# Altium PCB pcb_ordered.PcbDoc
Units mm, origin at the board's own origin, x right, y up, seen from the top; angles counter-clockwise.
Board outline 50.5 x 50 mm, 2 copper layers (Top Layer, Bottom Layer); 100 components, 66 nets, 343 pads, 290 vias.
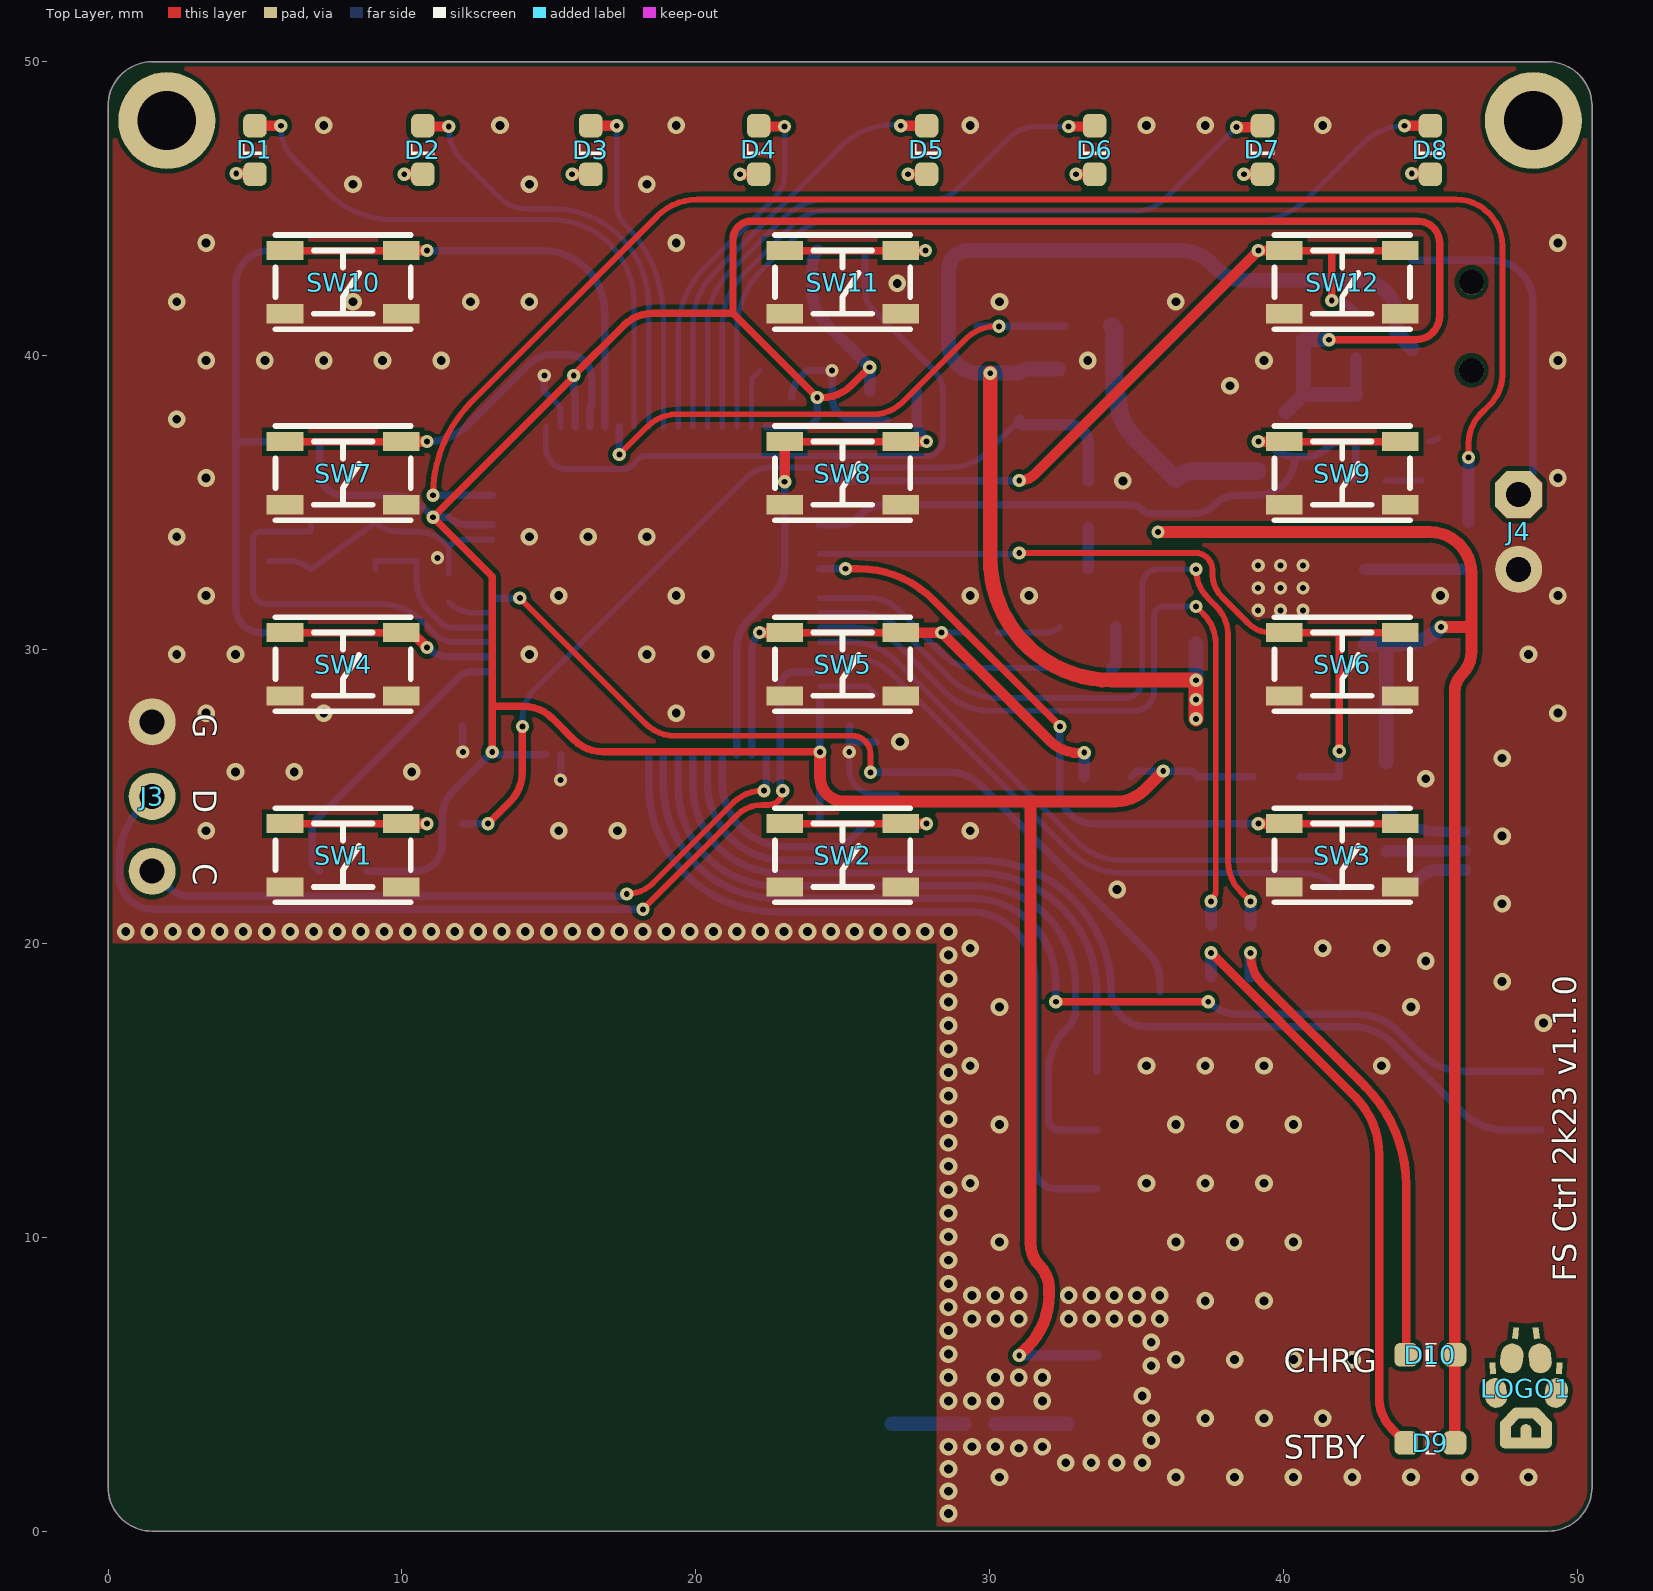
[diagram p0: Top Layer view]
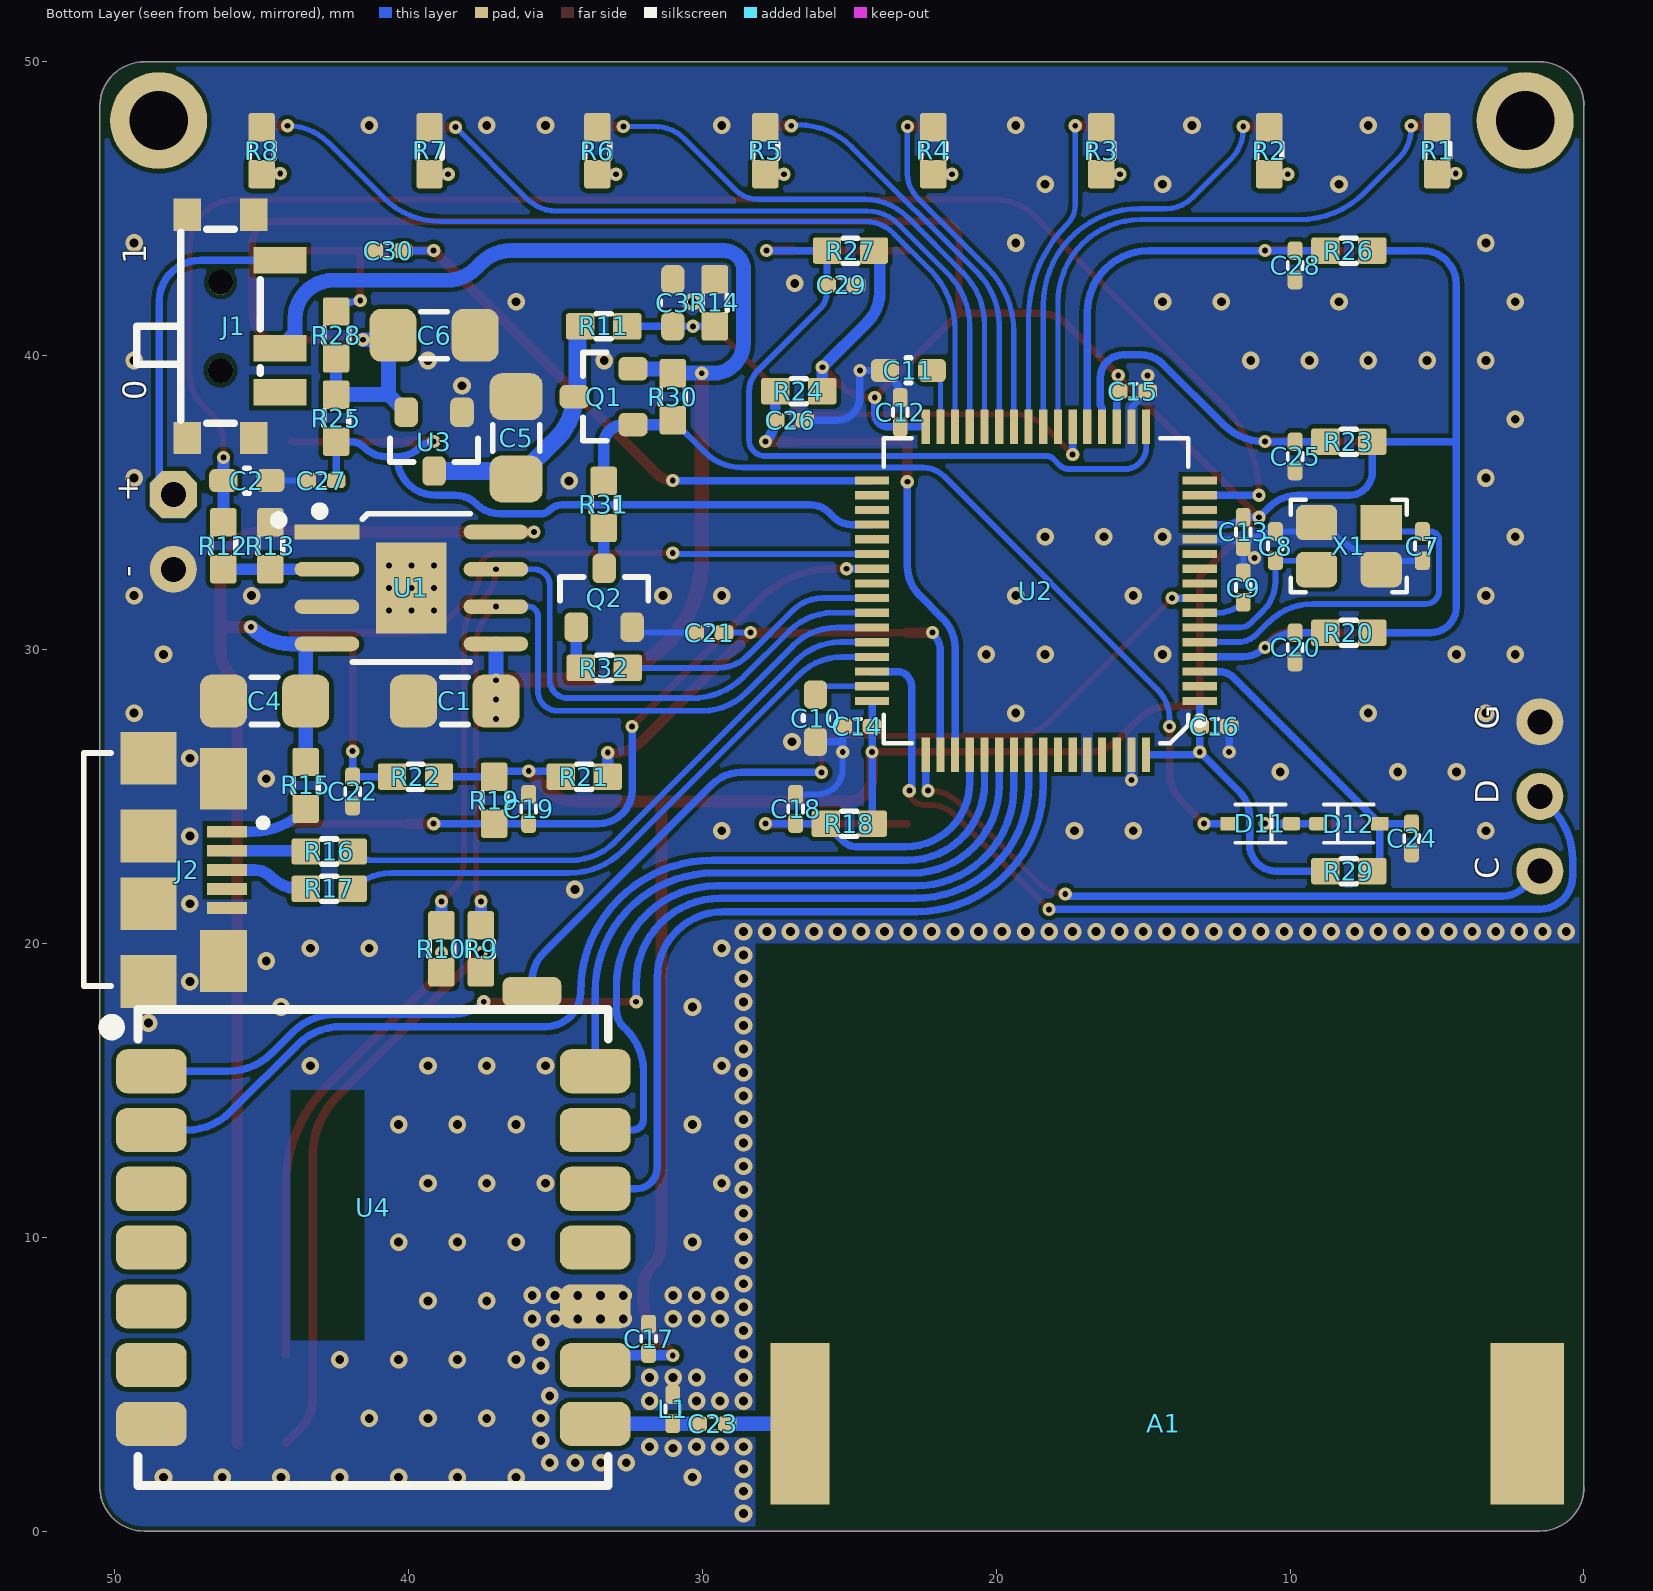
[diagram p1: Bottom Layer view, seen from below]
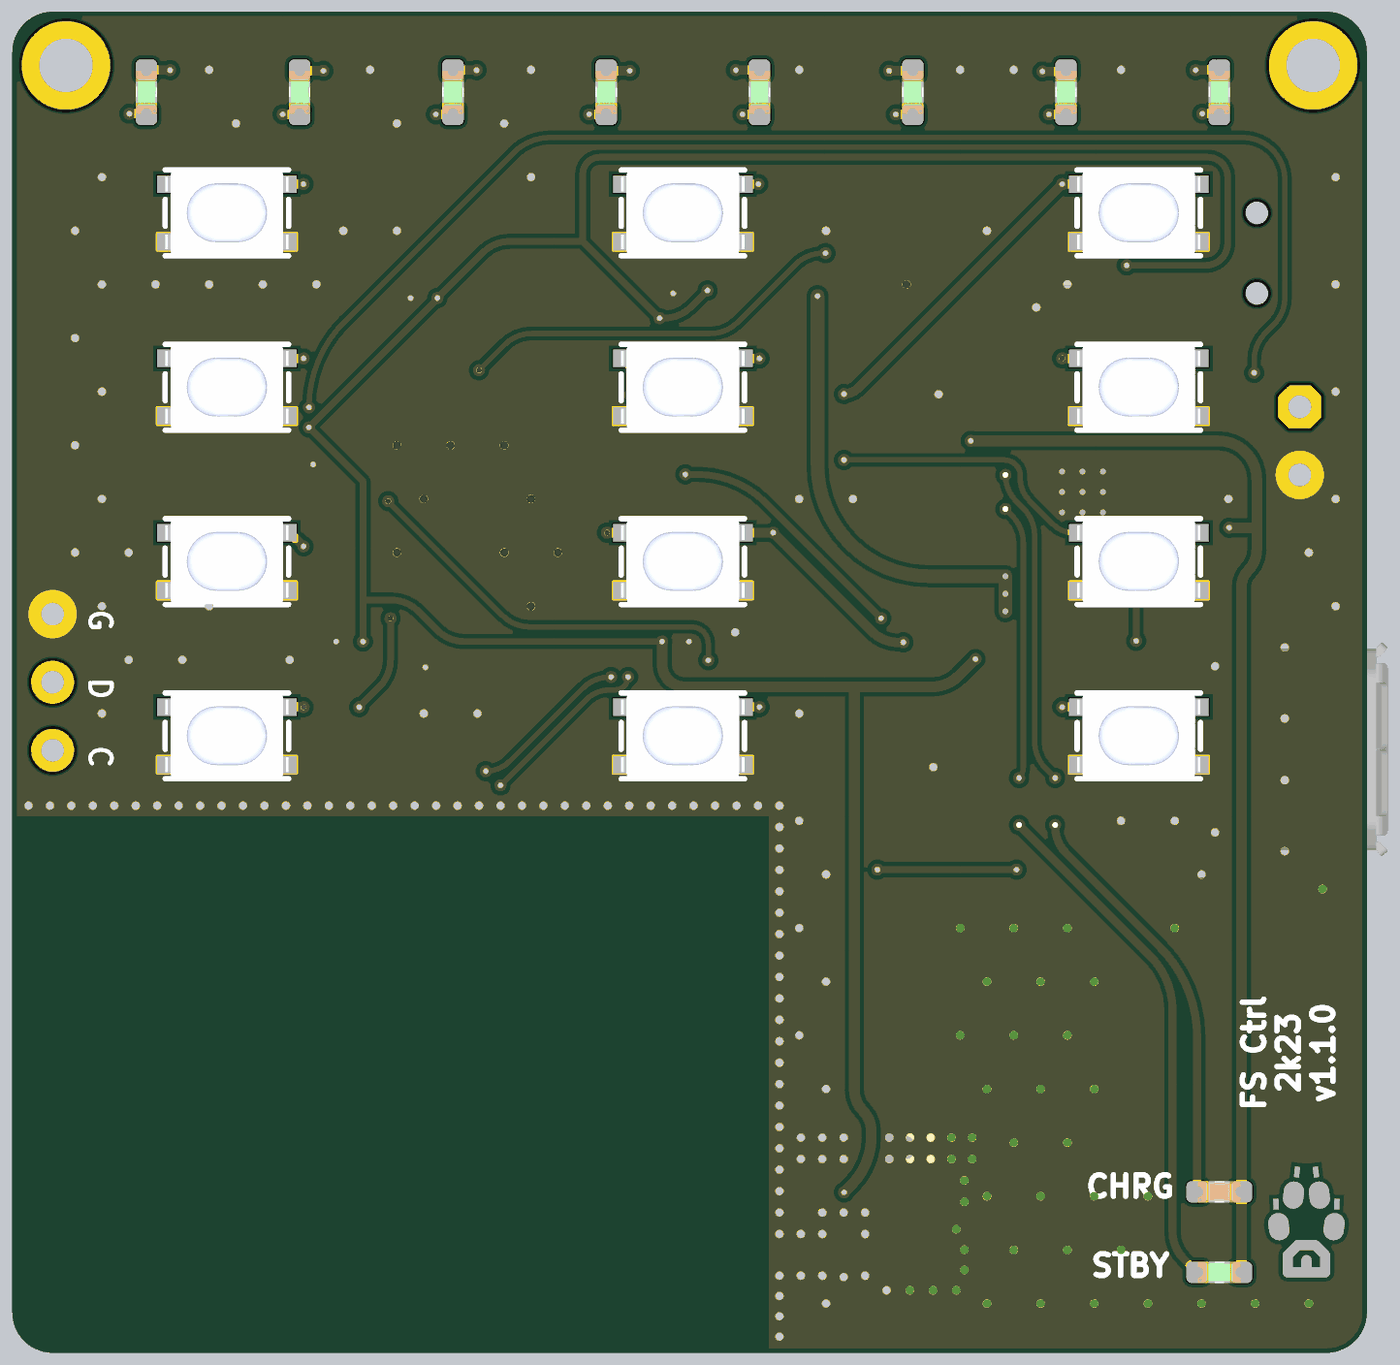
[diagram p2: 3D render of the assembled board from above, using the file's embedded part models]
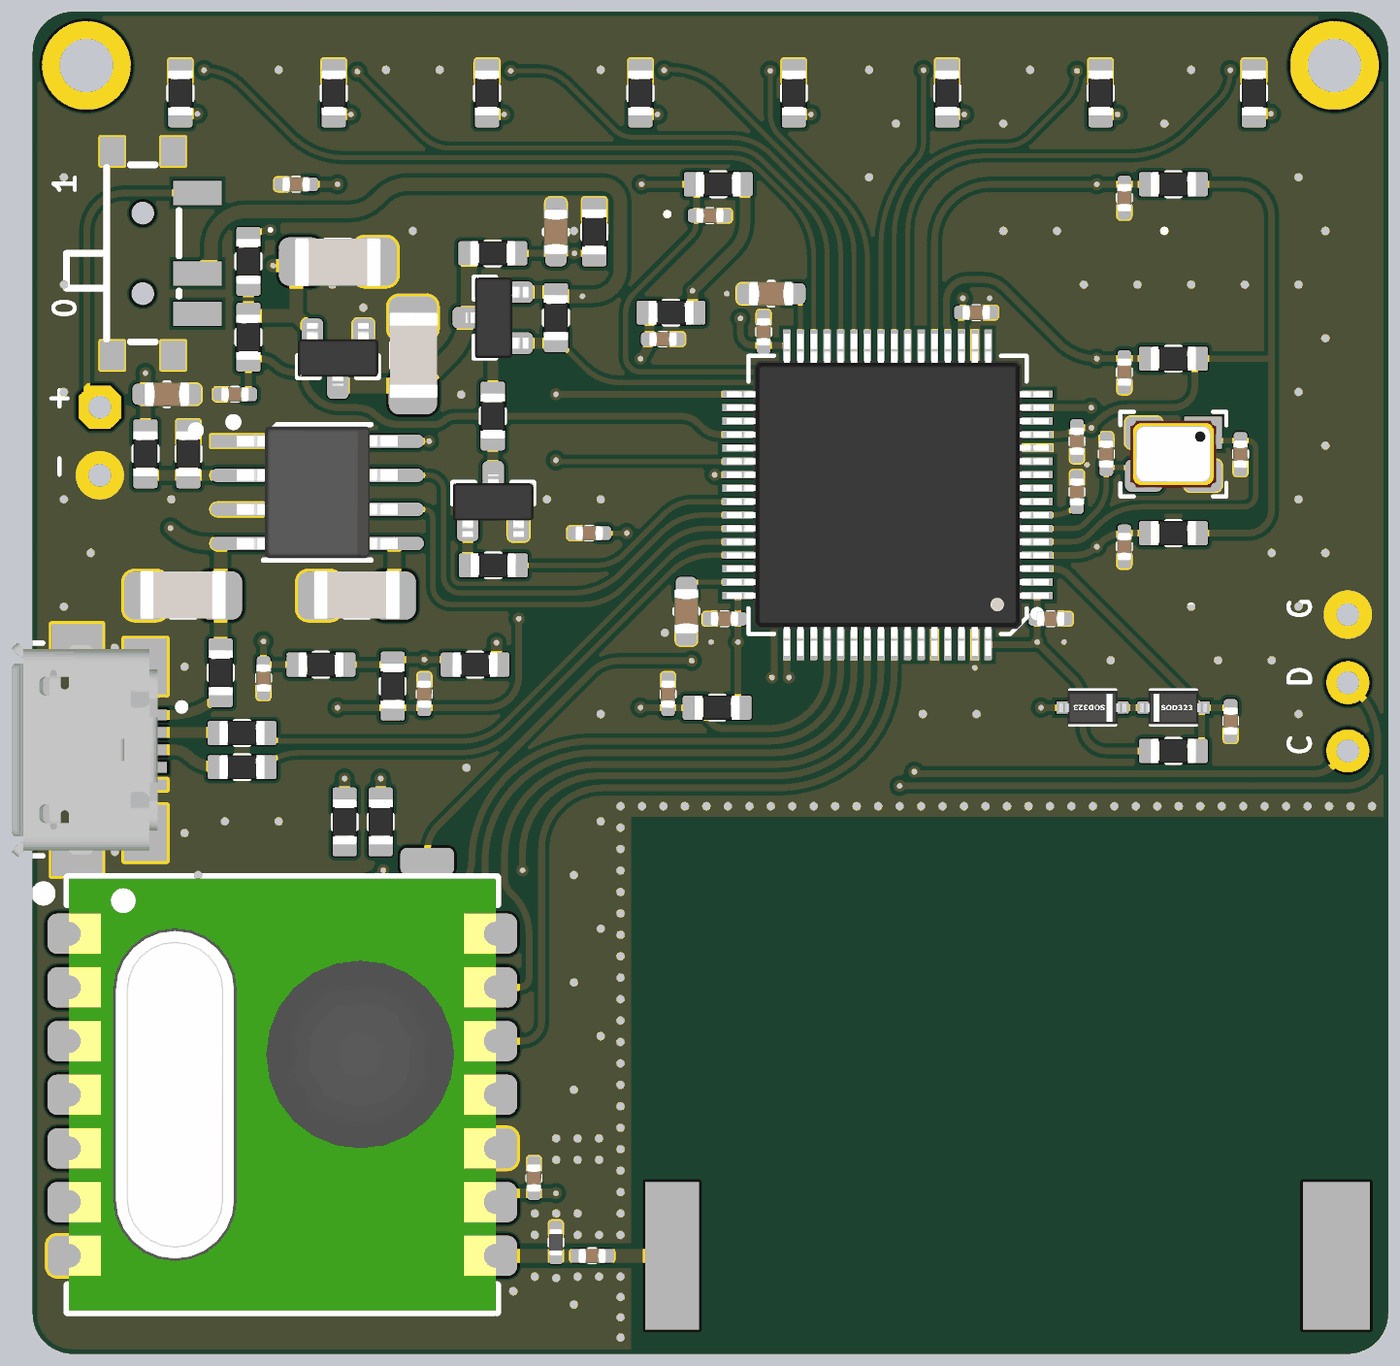
[diagram p3: 3D render of the assembled board from below, using the file's embedded part models]

## Layer stack, top to bottom
Top Solder: solder mask 0.0102, Solder Resist, Dk 3.5
Top Layer: signal copper 0.0356
Dielectric 1: dielectric 0.32, FR-4, Dk 4.8
Bottom Layer: signal copper 0.0356
Bottom Solder: solder mask 0.0102, Solder Resist, Dk 3.5

## Board outline
0.001,1.5 ccw(c1.5,1.5) 1.5,0 49,0 ccw(c49,1.5) 50.5,1.5 50.5,48.5 ccw(c49,48.5) 49,50 1.5,50 ccw(c1.5,48.5) 0.001,48.5 0,48.5

## Design rules (kind name [scope] priority, off if disabled: settings)
Clearance Clearance_1 [InNet('ANT')] p1: gap=0.152 ignorepadtopadclearanceinfootprint=FALSE except(0.762: Arc-Fill Arc-Poly Arc-Region Track-Fill Track-Poly Track-Region SMDPad-Fill SMDPad-Poly SMDPad-Region THPad-Fill THPad-Poly THPad-Region Via-Fill Via-Poly Via-Region Fill-Fill Fill-Poly Fill-Region Poly-Poly Poly-Region Region-Region)
Clearance [All] p2: gap=0.152 ignorepadtopadclearanceinfootprint=FALSE
MinimumSolderMaskSliver [All] p1 off: minsoldermaskwidth=0.254
PolygonConnect [All] p1: connectstyle=Direct reliefconductorwidth=0.254 reliefentries=4 polygonreliefangle="90 Angle" airgapwidth=0.254
RoutingVias [All] p1 off: holewidth=0.711 width=1.27 viastyle="Through Hole" minholewidth=0.711 minwidth=1.27 maxholewidth=0.711 maxwidth=1.27
SilkToSilkClearance [All] p1 off: silktosilkclearance=0.254
SilkToSolderMaskClearance [IsPad] p1 off: minsilkscreentomaskgap=0.254 clearancetoexposedcopper=TRUE
SolderMaskExpansion [All] p1: expansion=0.102 istentingtop=FALSE
Width [All] p1: maxlimit=12.7 minlimit=0.051 preferedwidth=0.254
27 further rules are at their usual default settings.

## Components (designator, comment, footprint, x,y, rotation, side; value= is the part's Value field where it differs from the comment)
A1 "ANT 433MHZ" 0433AT62A0020 14.301,3.65 r180 bottom
C1 "1u" C1206 38.425,28.25 r180 bottom
C2 "100n" C0603 45.5,35.75 r0 bottom
C3 "100n" C0603 31.007,41.799 r270 bottom
C4 "1u" C1206 44.9,28.25 r180 bottom
C5 "1u" C1206 36.336,37.203 r270 bottom
C6 "10u" C1206 39.13,40.693 r0 bottom
C7 "18pF" C0402 5.5,33.519 r90 bottom
C8 "18pF" C0402 10.5,33.519 r270 bottom
C9 "100n" C0402 11.594,32.11 r270 bottom
C10 "2u2" C0603 26.147,27.663 r90 bottom
C11 "2u2" C0603 22.987,39.497 r180 bottom
C12 "100n" C0402 23.266,38.075 r270 bottom
C13 "100n" C0402 11.594,34 r90 bottom
C14 "100n" C0402 24.725,27.384 r180 bottom
C15 "100n" C0402 15.348,38.792 r0 bottom
C16 "100n" C0402 12.575,27.384 r0 bottom
C17 "100n" C0402 31.827,6.545 r270 bottom
C18 "100n" C0402 26.828,24.575 r270 bottom
C19 "100n" C0402 35.91,24.575 r270 bottom
C20 "100n" C0402 9.828,30.075 r90 bottom
C21 "100n" C0402 29.765,30.575 r180 bottom
C22 "100n" C0402 41.9,25.175 r90 bottom
C23 "56pF" C0402 29.655,3.65 r0 bottom
C24 "100n" C0402 5.867,23.575 r90 bottom
C25 "100n" C0402 9.828,36.575 r90 bottom
C26 "100n" C0402 27.018,37.803 r0 bottom
C27 "100n" C0402 42.964,35.75 r180 bottom
C28 "100n" C0402 9.828,43.075 r90 bottom
C29 "100n" C0402 25.273,42.405 r0 bottom
C30 "100n" C0402 40.684,43.575 r180 bottom
D1 "GRN" LED-0603-GRN 5,47 r90 top
D2 "GRN" LED-0603-GRN 10.714,47 r90 top
D3 "GRN" LED-0603-GRN 16.429,47 r90 top
D4 "GRN" LED-0603-GRN 22.143,47 r90 top
D5 "GRN" LED-0603-GRN 27.857,47 r90 top
D6 "GRN" LED-0603-GRN 33.571,47 r90 top
D7 "GRN" LED-0603-GRN 39.286,47 r90 top
D8 "GRN" LED-0603-GRN 45,47 r90 top
D9 "GRN" LED-0603-GRN 45,3 r0 top
D10 "RED" LED-0603-RED 45,6 r0 top
D11 "1N4148WS" SOD-323 11.011,24.075 r0 bottom
D12 "1N4148WS" SOD-323 8,24.075 r180 bottom
J1 "MK-12C02-G025" SW-SMD_MK-12C02-G025 45.95,41 r270 bottom
J2 "MICROQTJ" CONN-USB-MICRO_#1 45.5,22.5 r0 bottom
J3 "SWD" HDR-1X3_2.54 1.5,25 r180 top
J4 "Header 2" HDR-1X2_2.54 48,34 r0 top
L1 "18nH" L0402 31.009,4.15 r90 bottom
LOGO1 "LOGO" LOGO 48.25,3 r0 top
Q1 "IRLML6402" SOT-23 33.359,38.603 r180 bottom
Q2 "IRLML2502" SOT-23 33.343,31.763 r270 bottom
R1 "220" R0603 5,46.975 r270 bottom
R2 "220" R0603 10.714,46.975 r270 bottom
R3 "220" R0603 16.429,46.975 r270 bottom
R4 "220" R0603 22.143,46.975 r270 bottom
R5 "220" R0603 27.857,46.975 r270 bottom
R6 "220" R0603 33.572,46.975 r270 bottom
R7 "220" R0603 39.286,46.975 r270 bottom
R8 "220" R0603 45,46.975 r270 bottom
R9 "220" R0603 37.537,19.815 r270 bottom
R10 "220" R0603 38.879,19.815 r270 bottom
R11 "1M" R0603 33.359,40.999 r0 bottom
R12 "10k" R0603 46.3,33.53 r270 bottom
R13 "3k3" R0603 44.7,33.53 r270 bottom
R14 "470k" R0603 29.576,41.799 r270 bottom
R15 "0R47" R0603 43.5,25.375 r90 bottom
R16 "22" R0603 42.7,23.127 r180 bottom
R17 "22" R0603 42.7,21.856 r180 bottom
R18 "10k" R0603 25,24.075 r180 bottom
R19 "10k" R0603 37.088,24.875 r90 bottom
R20 "10k" R0603 8,30.575 r180 bottom
R21 "10k" R0603 34.02,25.675 r0 bottom
R22 "10k" R0603 39.761,25.675 r180 bottom
R23 "10k" R0603 8,37.075 r180 bottom
R24 "10k" R0603 26.718,38.792 r180 bottom
R25 "10k" R0603 42.464,37.875 r90 bottom
R26 "10k" R0603 8,43.575 r180 bottom
R27 "10k" R0603 24.959,43.575 r180 bottom
R28 "10k" R0603 42.464,40.701 r270 bottom
R29 "10k" R0603 8,22.46 r180 bottom
R30 "100k" R0603 31.007,38.603 r90 bottom
R31 "100" R0603 33.359,34.938 r90 bottom
R32 "100" R0603 33.343,29.375 r0 bottom
SW1 "PTS810SJS250" BTN_PTS810 8,23 r0 top
SW2 "PTS810SJS250" BTN_PTS810 25,23 r0 top
SW3 "PTS810SJS250" BTN_PTS810 42,23 r0 top
SW4 "PTS810SJS250" BTN_PTS810 8,29.5 r0 top
SW5 "PTS810SJS250" BTN_PTS810 25,29.5 r0 top
SW6 "PTS810SJS250" BTN_PTS810 42,29.5 r0 top
SW7 "PTS810SJS250" BTN_PTS810 8,36 r0 top
SW8 "PTS810SJS250" BTN_PTS810 25,36 r0 top
SW9 "PTS810SJS250" BTN_PTS810 42,36 r0 top
SW10 "PTS810SJS250" BTN_PTS810 8,42.5 r0 top
SW11 "PTS810SJS250" BTN_PTS810 25,42.5 r0 top
SW12 "PTS810SJS250" BTN_PTS810 42,42.5 r0 top
U1 "TP4056" PowerSOIC-8 39.9,32.095 r270 bottom
U2 "STM32F405RGT6" LQFP-64 18.65,32 r90 bottom
U3 "XC6206P332MR" SOT-23 39.13,37.075 r90 bottom
U4 "RFM12B" RFM12B 41.201,9.65 r180 bottom
X1 "12MHZ" CRYSTAL_3.2x2.5mm 8,33.519 r0 bottom

## Footprints (in the part's own frame and the unit in brackets; to place one, negate y for a bottom-side part, rotate by r counter-clockwise, add the part's x,y. Pads: shape width x height; smd on the part's side, far side on the other; paste and mask are expansions set on the pad)
0433AT62A0020 [mm]
  rect 2x5.5 smd: 1(-12.375,0)
  rect 2.5x5.5 smd: 2(12.375,0)
  body extent -12.27,-2.5 12.73,2.5, height 1.2
BTN_PTS810 [mm]
  rect 1.25x0.65 smd mask+0.05: 1(-1.975,1.075) 2(1.975,1.075) 3(-1.975,-1.075) 4(1.975,-1.075)
  silkscreen extent -2.3,-1.6 2.3,1.6, body extent -2.3,-1.6 2.3,1.6, height 2.5
C0402 [mm] "Chip Capacitor Body"
  rrect50% 0.635x0.508 smd mask+0.05: 1(-0.5,0) 2(0.5,0)
  silkscreen extent -0.13,-0.25 0.13,0.25, body extent -0.52,-0.27 0.53,0.28, height 0.55
C0603 [mil] "Chip Capacitor"
  rrect50% 38x31 smd mask+1.97: 1(-31.5,0) 2(31.5,0)
  silkscreen extent -3,-17 3,17, body extent -33,-18 33,18, height 35
C1206 [mm] "Chip Capacitor"
  rrect50% 1.6x1.8 smd: 1(-1.4,0) 2(1.4,0)
  silkscreen extent -0.45,-0.8 0.45,0.8, body extent -1.6,-0.88 1.6,0.92, height 1.6
CONN-USB-MICRO_#1 [mm] "Connector; USB2.0, Type B, SM; 5 Position; Right Angle"
  rect 1.35x0.4 smd: 1(0.675,-1.3) 2(0.675,-0.65) 3(0.675,0) 4(0.675,0.65) 5(0.675,1.3)
  rect 1.6x2.1 smd: 6(0.8,-3.1) 6(0.8,3.1)
  rect 1.9x1.8 smd: 6(3.35,-3.8) 6(3.35,-1.15) 6(3.35,1.15) 6(3.35,3.8)
  silkscreen extent -0.67,-3.98 5.55,3.95, body extent 0.35,-3.99 5.78,3.99, height 2.69
CRYSTAL_3.2x2.5mm [mm]
  rect 1.4x1.2 smd mask+0.05: 1(-1.1,-0.8)
  rrect40% 1.4x1.2 smd mask+0.05: 2(-1.1,0.8) 3(1.1,0.8) 4(1.1,-0.8)
  silkscreen extent -1.97,-1.57 1.97,1.57, body extent -1.6,-1.25 1.6,1.25, height 0.82
HDR-1X2_2.54 [mm]
  oct 1.6x1.6 hole 0.85: 1(0,1.27)
  round 1.6 hole 0.85: 2(0,-1.27)
  Top Layer region: -0.4,0.47 -0.8,0.87 -0.8,1.67 -0.4,2.07 0.4,2.07 0.8,1.67 0.8,0.87 0.4,0.47
  Bottom Layer region: -0.4,0.47 -0.8,0.87 -0.8,1.67 -0.4,2.07 0.4,2.07 0.8,1.67 0.8,0.87 0.4,0.47
HDR-1X3_2.54 [mm]
  round 1.6 hole 0.85: 1(0,2.54) 2(0,0) 3(0,-2.54)
L0402 [mm] "Chip Inductor"
  rrect50% 0.635x0.508 smd mask+0.05: 1(-0.5,0) 2(0.5,0)
  silkscreen extent -0.13,-0.25 0.13,0.25, body extent -0.5,-0.25 0.5,0.25, height 0.5
LED-0603-GRN [mm]
  rrect50% 0.8x0.8 smd mask+0.05: 1(0.825,0) 2(-0.825,0)
  silkscreen extent -0.18,-0.4 0.2,0.4, body extent -0.8,-0.4 0.8,0.4, height 0.6
LED-0603-RED [mm]
  rrect50% 0.8x0.8 smd paste+0 mask+0.05: 1(0.825,0) 2(-0.825,0)
  silkscreen extent -0.18,-0.4 0.2,0.4, body extent -0.8,-0.4 0.8,0.4, height 0.6
LOGO [mil]
  rect 15.75x7.87 smd rot 93 mask+4: ""(-44.55,100)
  oval 30x40 smd rot 8 mask+4: ""(-40.55,67)
  oval 15x39.5 smd mask+4: ""(-27.5,12.5) ""(27.5,12.5)
  oval 15x36.21 smd rot 135 mask+4: ""(-20,32.5)
  oval 30x40 smd rot 173 mask+4: ""(-18.99,113.27)
  rect 15.75x7.87 smd rot 83 mask+4: ""(-13.91,147.15)
  oval 70x15 smd mask+4: ""(0,0)
  oval 15x32.5 smd mask+4: ""(0,9)
  oval 39.5x15 smd mask+4: ""(0,40)
  rect 15.75x7.87 smd rot 97 mask+4: ""(13.91,147.15)
  oval 30x40 smd rot 7 mask+4: ""(18.99,113.27)
  oval 15x36.21 smd rot 45 mask+4: ""(20,32.5)
  oval 30x40 smd rot 172 mask+4: ""(40.55,67)
  rect 15.75x7.87 smd rot 87 mask+4: ""(44.55,100)
LQFP-64 [mil]
  rect 11x46 smd mask+0.98: 1(-147.64,-219.5) 2(-127.95,-219.5) 3(-108.27,-219.5) 4(-88.58,-219.5) 5(-68.9,-219.5) 6(-49.21,-219.5) 7(-29.53,-219.5) 8(-9.84,-219.5) 9(9.84,-219.5) 10(29.53,-219.5) 11(49.21,-219.5) 12(68.9,-219.5) 13(88.58,-219.5) 14(108.27,-219.5) 15(127.95,-219.5) 16(147.64,-219.5) 33(147.64,219.5) 34(127.95,219.5) 35(108.27,219.5) 36(88.58,219.5) 37(68.9,219.5) 38(49.21,219.5) 39(29.53,219.5) 40(9.84,219.5) 41(-9.84,219.5) 42(-29.53,219.5) 43(-49.21,219.5) 44(-68.9,219.5) 45(-88.58,219.5) 46(-108.27,219.5) 47(-127.95,219.5) 48(-147.64,219.5)
  rect 46x11 smd mask+0.98: 17(219.5,-147.64) 18(219.5,-127.95) 19(219.5,-108.27) 20(219.5,-88.58) 21(219.5,-68.9) 22(219.5,-49.21) 23(219.5,-29.53) 24(219.5,-9.84) 25(219.5,9.84) 26(219.5,29.53) 27(219.5,49.21) 28(219.5,68.9) 29(219.5,88.58) 30(219.5,108.27) 31(219.5,127.95) 32(219.5,147.64) 49(-219.5,147.64) 50(-219.5,127.95) 51(-219.5,108.27) 52(-219.5,88.58) 53(-219.5,68.9) 54(-219.5,49.21) 55(-219.5,29.53) 56(-219.5,9.84) 57(-219.5,-9.84) 58(-219.5,-29.53) 59(-219.5,-49.21) 60(-219.5,-68.9) 61(-219.5,-88.58) 62(-219.5,-108.27) 63(-219.5,-127.95) 64(-219.5,-147.64)
  silkscreen extent -204,-224 204,204, body extent -236,-236 236,236, height 59
PowerSOIC-8 [mm]
  rect 0.5x2.2 smd mask+0.05: 1(-1.905,-2.875)
  oval 0.5x2.2 smd mask+0.05: 2(-0.635,-2.875) 3(0.635,-2.875) 4(1.905,-2.875) 5(1.905,2.875) 6(0.635,2.875) 7(-0.635,2.875) 8(-1.905,2.875)
  rect 3.1x2.4 smd mask+0.05: 9(0,0)
  silkscreen extent -2.67,-4.57 2.52,2, body extent -2.45,-3 2.45,3, height 1.68
R0603 [mil] "Chip Resistor; Body 1.6 x 0.8 mm (LxW typ)"
  rrect20% 38x35.43 smd mask+1.97: 1(-31.5,0) 2(31.5,0)
  silkscreen extent -10,-17 10,17, body extent -33,-18 33,18, height 22
RFM12B [mm]
  rrect50% 2.4x1.5 smd: 1(-7.55,6) 2(-7.55,4) 3(-7.55,2) 4(-7.55,0) 5(-7.55,-2) 6(-7.55,-4) 7(-7.55,-6) 8(7.55,-6) 9(7.55,-4) 10(7.55,-2) 11(7.55,0) 12(7.55,2) 13(7.55,4) 14(7.55,6)
  rrect50% 2x1 smd: 15(5.4,8.7)
  Top Layer pour cut-out: -2.8,-3.15 -0.3,-3.15 -0.3,5.35 -2.8,5.35
  silkscreen extent -9.1,-8.1 8,8.1, body extent -7.96,-8.05 7.96,8.05, height 4.12
SOD-323 [mm]
  rect 0.59x0.45 smd mask+0.05: 1(1.055,0)
  rrect30% 0.59x0.45 smd mask+0.05: 2(-1.055,0)
  silkscreen extent -0.85,-0.65 0.85,0.65, body extent -1.25,-0.63 1.25,0.62, height 0.99
SOT-23 [mm]
  rrect50% 1x0.8 smd mask+0.05: 1(1,-0.95) 2(1,0.95) 3(-1,0)
  silkscreen extent -0.7,-1.5 0.1,1.5, body extent -1.27,-1.5 1.33,1.5, height 1.1
SW-SMD_MK-12C02-G025 [mm]
  rect 0.9x1.8 smd paste+0 mask+0.051: 1(-2.25,1.583) 2(0.75,1.583) 3(2.25,1.583)
  rect 1.1x0.93 smd paste+0 mask+0.051: 4(3.8,0.687) 5(3.8,-1.583) 6(-3.8,-1.583) 7(-3.8,0.687)
  round 0.85 hole 0.85 unplated paste-2539.97: ""(-1.5,-0.448) ""(1.5,-0.448)
  silkscreen extent -3.3,-3.3 3.3,0.9, body extent -3.3,-3.3 3.3,0.9, height 1.4

## Part data
A1: library part Component_2, "433 MHz ISM Antenna"
C1 C2 C3 C4 C5 C6 C9 C10 C11 C12 C13 C14 C15 C16 C17 C18 C19 C20 C21 C22 C24 C25 C26 C27 C28 C29 C30: library part Cap
C7 C8: library part CAP, "18pF 0402"
C23: library part CAP
D1 D2 D3 D4 D5 D6 D7 D8 D9: library part LED-0603-GREEN, "LED 0603 GRN"
D10: library part LED-0603-RED, "LED 0603 RED"
D11 D12: library part US1M-13-F
J1: LCSC part number=C778186, P/N=MK-12C02-G025
J3: library part "Header 3"
L1: library part BLM18AG601SN1D
Q1 Q2: library part 2N7002
R1 R2 R3 R4 R5 R6 R7 R8 R9 R10 R11 R13 R14 R29 R30 R31 R32: library part Res1
R12 R15 R16 R17 R18 R19 R20 R21 R22 R23 R24 R25 R26 R27 R28: library part RES
SW1 SW2 SW3 SW4 SW5 SW6 SW7 SW8 SW9 SW10 SW11 SW12: library part Component_1
U2: "MCU STM32F405RGT6"
U3: library part Component_4_1
U4: library part Component_1_1, P/N=RFM12B
X1: library part "CRYSTAL 12MHZ 3.20mm x 2.50mm", "X322512MOB4SI"

## Free pads (board coordinates)
  round 3.3 hole 2: M(2,48) M(48.5,48)

## Via types
v1: diameter 0.6, hole 0.3, Top Layer to Bottom Layer, tented both sides, 204 vias
v2: diameter 0.45, hole 0.2, Top Layer to Bottom Layer, tented both sides, 86 vias

## Nets (pads, with @x,y where several pads share a name; then routed paths per layer and width w, separated by ;. In a path a pad name is that pad's centre, name@x,y a point inside that pad or via, vN(x,y) a via of type N, cw(c..) or ccw(c..) an arc to the next point about the centre after c; other vN are vias at no path point)
3V3: C6.2 C12.2 C13.2 C14.2 C15.2 C16.2 C17.2 R18.2 R19.2 R20.2 R21.2 R22.2 R23.2 R24.2 R25.2 R26.2 R27.2 R28.2 R29.1 U2.1 U2.13 U2.19 U2.32 U2.48 U2.64 U3.2 U4.9 | length 172.9
  Top Layer w0.25: v2(13.075,26.517) 13.075,28.067 ; v2(24.225,26.517) 16.856,26.517 cw(c16.856,27.94) 15.85,26.934 15.133,27.65 ccw(c14.127,26.645) 14.127,28.067 13.075,28.067 ; v2(25.917,39.608) 25.302,38.992 cw(c24.296,39.998) 24.296,38.575 v2(24.133,38.575) 21.267,41.441 ; v2(41.547,40.543) 44.497,40.543 ccw(c44.497,41.36) 45.314,41.36 45.314,43.835 ccw(c44.571,43.835) 44.571,44.577 21.885,44.577 ccw(c21.885,43.958) 21.267,43.958 21.267,41.441 ; 13.075,28.067 13.075,32.483 v2(11.058,34.5) 15.848,39.29 v2(15.848,39.328) 17.544,41.025 cw(c18.55,40.019) 18.55,41.441 21.267,41.441
  Top Layer w0.4: v2(24.225,26.517) 24.225,25.672 ccw(c25.071,25.672) 25.071,24.826 31.394,24.826 ; v2(31.009,5.98) 31.281,6.252 ccw(c29.485,8.048) 32.025,8.048 32.025,8.266 ccw(c30.949,8.266) 31.71,9.027 cw(c32.471,9.789) 31.394,9.789 31.394,24.826 ; v2(35.91,25.863) 35.29,25.243 cw(c34.284,26.249) 34.284,24.826 31.394,24.826
  Bottom Layer w0.25: R20.2 5.217,30.575 cw(c5.217,31.448) 4.343,31.448 4.343,37.075 ; R26.2 5.5,43.575 ccw(c5.5,42.418) 4.343,42.418 4.343,37.075 ; R29.1 10.471,22.46 ccw(c10.471,23.368) 11.379,23.368 11.379,24.308 cw(c12.62,24.308) 11.743,25.185 v2(13.075,26.517) ; U2.1 C16.2 v2(13.075,26.517) ; U2.13 12.198,34.25 cw(c12.198,35.104) C13.2 v2(11.058,34.5) 10.725,34.833 ccw(c9.719,33.828) 9.719,35.25 8,35.25 cw(c8,36.05) 7.2,36.05 R23.2 4.343,37.075 ; U2.64 13.298,26.425 cw(c13.298,26.741) v2(13.075,26.517) ; v2(15.848,39.328) C15.2 cw(c15.723,38.667) 15.9,38.667 U2.19 ; U2.32 C12.2 23.7,37.575 ccw(c23.7,38.008) 24.133,38.008 v2(24.133,38.575) ; R18.2@24.225,24.075 v2(24.225,26.517) C14.2 U2.48 ; R21.2 35.008,25.863 v2(35.91,25.863) 36.9,25.863 R19.2 R22.2
  Bottom Layer w0.35: v2(31.009,5.98) U4.9@33.651,5.98
  Bottom Layer w0.4: R27.2 ccw(c24.634,43.101) 23.963,43.101 23.963,42.152 ccw(c25.385,42.152) 24.379,41.146 v2(25.917,39.608) R24.2 ; R25.2 R28.2
  Bottom Layer w0.5: U3.2 40.68,38.675 ; v2(41.547,40.543) 40.68,40.543 40.68,38.675 ; R25.2 40.68,38.675
5V: C4.2 D9.1 D10.1 R15.2 U1.4 U1.8 | length 50.3
  Top Layer w0.4: v2(35.731,34) 44.976,34 cw(c44.976,32.578) 46.398,32.578 46.398,30.763 ; v2(45.365,30.763) 46.398,30.763 ; D9.1 D10.1 45.825,28.564 cw(c46.668,28.564) 46.072,29.16 ccw(c45.284,29.948) 46.398,29.948 46.398,30.763
  Bottom Layer w0.254: v2(35.731,34) U1.8
  Bottom Layer w0.5: U1.4 U1.4@43.5,30.19 ; R15.2 C4.2 U1.4@43.5,30.19 ; v2(45.365,30.763) cw(c43.983,32.145) 43.983,30.19 U1.4@43.5,30.19
ADC7: C3.2 R11.1 R14.2 U2.22 | length 18.5
  Top Layer w0.2: v2(17.4,36.635) 18.353,37.588 cw(c19.358,36.582) 19.358,38.005 26.036,38.005 ccw(c26.036,39.427) 27.042,38.421 29.203,40.582 cw(c30.208,39.576) 30.208,40.999 v2(30.317,40.999)
  Bottom Layer w0.254: v2(17.4,36.635) U2.22 ; R14.2 v2(30.317,40.999) C3.2 R11.1
BTN0: C24.2 D12.1 R29.2 U2.3 | length 11
  Bottom Layer w0.254: C24.2 D12.1 ; R29.2 6.945,22.715 D12.1 ; U2.3 12.438,29.25 ccw(c12.438,28.482) 11.895,29.025 D12.1
BTN0_IN: D11.2 D12.2 SW1.1 SW1.2 | length 6.6
  Top Layer w0.254: SW1.1 SW1.2
  Top Layer w0.35: SW1.2 v2(10.856,24.075)
  Bottom Layer w0.254: D12.2 v2(10.856,24.075)
BTN1: C18.2 R18.1 SW2.1 SW2.2 U2.52 | length 14.3
  Top Layer w0.254: SW2.1 SW2.2
  Top Layer w0.35: SW2.2 v2(27.856,24.075)
  Bottom Layer w0.254: U2.52 20.9,25.471 ccw(c23.081,25.471) 23.081,23.29 24.773,23.29 ccw(c24.773,23.876) 25.187,23.462 R18.1 C18.2 v2(27.856,24.075)
BTN2: C19.2 R19.1 SW3.1 SW3.2 U2.39 | length 24.6
  Top Layer w0.25: v2(25.092,32.75) 25.539,32.75 cw(c25.539,29.16) 28.078,31.698 v2(32.393,27.384)
  Top Layer w0.254: SW3.1 SW3.2
  Top Layer w0.35: v2(39.144,24.075) SW3.1
  Bottom Layer w0.25: U2.39 v2(25.092,32.75)
  Bottom Layer w0.254: v2(32.393,27.384) 32.393,25.22 ccw(c33.538,25.22) 33.538,24.075 C19.2 ; C19.2 R19.1 v2(39.144,24.075)
BTN3: C20.2 R20.1 SW4.1 SW4.2 U2.4 | length 9.5
  Top Layer w0.254: SW4.1 SW4.2
  Top Layer w0.35: SW4.2 cw(c9.975,29.674) 10.612,30.311 v2(10.856,30.067)
  Bottom Layer w0.25: v2(10.856,30.067) ccw(c11.621,30.832) 11.621,29.75 U2.4
  Bottom Layer w0.254: R20.1 C20.2 cw(c9.828,29.32) 10.716,30.207 v2(10.856,30.067)
BTN4: C21.2 R21.1 SW5.1 SW5.2 U2.50 | length 18.6
  Top Layer w0.254: SW5.1 SW5.2
  Top Layer w0.35: v2(22.169,30.575) SW5.1 ; SW5.2 v2(28.364,30.575) 32.048,26.891 ccw(c33.041,27.883) v2(33.22,26.491)
  Bottom Layer w0.2: v2(28.364,30.575) C21.2
  Bottom Layer w0.254: U2.50 21.9,29.925 cw(c22.819,29.925) v2(22.169,30.575)
  Bottom Layer w0.4: R21.1 v2(33.22,26.491)
BTN5: C22.2 R22.1 SW6.1 SW6.2 U2.38 | length 27.5
  Top Layer w0.2: v2(31.007,33.288) 36.998,33.288 cw(c36.998,32.703) 37.583,32.703 ccw(c38.738,32.595) 37.918,31.775 38.804,30.889 ccw(c39.562,31.647) 39.562,30.575 SW6.1
  Top Layer w0.254: SW6.1 41.9,30.575 ; v2(41.9,26.542) 41.9,30.575 ; SW6.2 41.9,30.575
  Bottom Layer w0.2: U2.38 30.968,33.25 ccw(c30.968,33.288) v2(31.007,33.288)
  Bottom Layer w0.25: R22.1 C22.2 v2(41.9,26.542)
BTN6: C25.2 R23.1 SW7.1 SW7.2 U2.20 | length 15.7
  Top Layer w0.254: SW7.1 SW7.2
  Top Layer w0.35: SW7.2 v2(10.856,37.075)
  Bottom Layer w0.254: R23.1 C25.2 v2(10.856,37.075) ccw(c10.856,39.08) 12.274,37.662 14.325,39.714 cw(c15.077,38.962) 15.077,40.025 15.684,40.025 cw(c15.684,39.253) 16.456,39.253 16.456,38.324 ccw(c16.59,38.19) 16.4,38.19 U2.20
BTN7: C26.2 R24.1 SW8.1 SW8.2 U2.51 | length 17.8
  Top Layer w0.254: SW8.1 SW8.2
  Top Layer w0.35: v2(23.025,35.711) SW8.1 ; SW8.2 v2(27.856,37.075)
  Bottom Layer w0.254: U2.51 21.4,30.048 cw(c22.822,30.048) 21.817,31.053 22.608,31.845 ccw(c21.603,32.851) 23.025,32.851 v2(23.025,35.711)
  Bottom Layer w0.35: R24.1 27.518,37.892 ccw(c28.673,37.892) v2(27.856,37.075)
BTN8: C27.2 R25.1 SW9.1 SW9.2 U2.36 | length 27.1
  Top Layer w0.254: SW9.1 SW9.2
  Top Layer w0.35: v2(39.144,37.075) SW9.1
  Bottom Layer w0.254: U2.36 24.922,34.25 ccw(c24.922,35.12) 25.536,34.505 25.698,34.667 cw(c26.323,34.041) 26.323,34.926 34.769,34.926 cw(c34.769,34.326) 35.193,34.75 ccw(c35.506,35.063) 35.506,34.62 36.884,34.62 ccw(c36.884,35.773) 37.699,34.958 cw(c38.404,34.253) 38.404,35.25 39.081,35.25 ccw(c39.081,36.559) 40.39,36.559 ; v2(39.144,37.075) cw(c39.144,36.418) 39.608,36.883 ccw(c40.39,37.665) 40.39,36.559 ; C27.2 R25.1 42,37.075 ccw(c42,36.35) 41.487,36.863 cw(c40.754,37.596) 40.754,36.559 40.39,36.559
BTN9: C28.2 R26.1 SW10.1 SW10.2 U2.21 | length 18
  Top Layer w0.254: SW10.1 SW10.2
  Top Layer w0.35: SW10.2 v2(10.856,43.575)
  Bottom Layer w0.254: R26.1 C28.2 v2(10.856,43.575) 14.792,43.575 cw(c14.792,41.467) 16.9,41.467 U2.21
BTN10: C29.2 R27.1 SW11.1 SW11.2 U2.17 | length 29.4
  Top Layer w0.254: SW11.1 26.934,43.575 SW11.2
  Top Layer w0.35: SW11.2@26.934,43.575 v2(27.815,43.575)
  Bottom Layer w0.2: U2.17 14.896,36.885 ccw(c15.635,36.877) 15.635,36.138 17.505,36.138 ccw(c17.505,36.628) 17.852,36.281 18.051,36.481 cw(c18.3,36.232) 18.3,36.584 27.856,36.584 ccw(c27.856,37.141) 28.414,37.141 28.414,38.764 ccw(c27.384,38.764) 28.112,39.491 25.976,41.628 cw(c26.466,42.118) 25.773,42.118 C29.2
  Bottom Layer w0.254: C29.2 cw(c25.805,42.437) 25.759,42.437 R27.1 v2(27.815,43.575)
BTN11: C30.2 R28.1 SW12.1 SW12.2 U2.33 | length 26.6
  Top Layer w0.254: SW12.1 41.644,43.575 ; v2(41.644,41.873) 41.644,43.575 ; SW12.2 41.644,43.575
  Top Layer w0.35: v2(31.007,35.75) ccw(c31.007,36.504) 31.54,35.971 v2(39.144,43.575) SW12.1
  Bottom Layer w0.254: U2.33 v2(31.007,35.75) ; v2(39.144,43.575) C30.2 ; v2(41.644,41.873) cw(c41.644,40.793) 42.408,41.557 R28.1
C\S\: U2.54 U4.14 | length 21.5
  Bottom Layer w0.254: U2.54 19.9,25.371 ccw(c22.875,25.371) 22.875,22.395 29.603,22.395 cw(c29.603,18.348) 33.651,18.348 U4.14
CHRG: R10.1 U1.7 U2.42 | length 30.4
  Top Layer w0.2: v2(37.025,32.73) ccw(c38.416,32.73) 37.432,31.746 37.699,31.479 cw(c36.694,30.474) 38.116,30.474 38.116,22.783 ccw(c39.538,22.783) 38.533,21.777 v2(38.879,21.431)
  Bottom Layer w0.2: U2.42 25.548,31.25 cw(c25.548,29.142) 27.037,30.634 ; 27.038,30.633 ccw(c25.548,29.142) 27.037,30.634 ; v2(37.025,32.73) 35.735,32.73 ccw(c35.735,32.188) 35.193,32.188 35.193,28.956 cw(c34.581,28.956) 34.581,28.344 30.369,28.344 cw(c30.369,30.859) 28.59,29.081 27.037,30.634
  Bottom Layer w0.4: R10.1 v2(38.879,21.431)
CUR_MON: C2.2 R12.1 U2.15 | length 54.1
  Top Layer w0.2: v2(11.058,35.25) cw(c15.568,35.25) 12.379,38.439 18.685,44.745 cw(c20.063,43.366) 20.063,45.316 45.87,45.316 cw(c45.87,43.739) 47.447,43.739 47.447,39.342 cw(c46.025,39.342) 47.031,38.336 46.717,38.023 ccw(c47.722,37.017) 46.3,37.017 v2(46.3,36.536)
  Bottom Layer w0.254: v2(11.058,35.25) U2.15
  Bottom Layer w0.4: R12.1 C2.2 v2(46.3,36.536)
DM: R16.2 U2.44 | length 20.6
  Bottom Layer w0.2: U2.44 25.307,30.25 cw(c25.307,28.142) 26.798,29.633 32.982,23.448 ccw(c34.473,24.939) 34.473,22.83 41.184,22.83 ccw(c41.184,23.843) R16.2
DP: R17.2 U2.45 | length 20.7
  Bottom Layer w0.2: U2.45 25.23,29.75 cw(c25.23,27.642) 26.721,29.133 32.695,23.158 ccw(c34.544,25.007) 34.544,22.392 40.605,22.392 cw(c40.605,20.56) R17.2
GND: C1.1 C2.1 C3.1 C4.1 C5.1 C6.1 C7.1 C8.1 C9.1 C10.1 C11.1 C12.1 C13.1 C14.1 C15.1 C16.1 C17.1 C18.1 C19.1 C20.1 C21.1 C22.1 C24.1 C25.1 C26.1 C27.1 C28.1 C29.1 C30.1 J1.4 J1.5 J1.6 J1.7 J2.5 J2.6 J3.3 J4.2 L1.2 Q2.2 R1.1 R2.1 R3.1 R4.1 R5.1 R6.1 R7.1 R8.1 R13.1 R14.1 SW1.3 SW1.4 SW2.3 SW2.4 SW3.3 SW3.4 SW4.3 SW4.4 SW5.3 SW5.4 SW6.3 SW6.4 SW7.3 SW7.4 SW8.3 SW8.4 SW9.3 SW9.4 SW10.3 SW10.4 SW11.3 SW11.4 SW12.3 SW12.4 U1.1 U1.3 U1.9 U2.12 U2.18 U2.60 U2.63 U3.1 U4.7 U4.10 X1.2 X1.4 | length 26.5
  Bottom Layer w0.203: C7.1 6.176,33.019 cw(c6.176,31.995) X1.2 X1.4 ccw(c9.824,35.043) 9.824,34.019 C8.1 cw(c10.5,32.629) 11.482,33.612 C13.1 ; C9.1 C13.1 ; U2.12 12.198,33.75 ccw(c12.198,32.896) C13.1 ; C15.1 15.368,38.272 cw(c15.292,38.195) 15.4,38.195 U2.18 ; v2(25.225,26.517) 25.225,25.935 ccw(c26.085,25.935) 26.085,25.075 C18.1 ; C21.1 31.94,30.575 ccw(c31.94,31.215) Q2.2 ; C27.1 C2.1 ; J1.4@44.961,37.075 ccw(c44.961,37.502) J1.4
  Bottom Layer w0.25: v2(12.075,26.517) C16.1 ; C15.1 v2(14.848,39.328) ; v2(15.4,25.558) U2.63 ; C12.1 cw(c24.235,38.575) 23.55,39.26 C11.1 v2(24.641,39.497) 24.641,38.588 ccw(c25.426,38.588) 25.426,37.803 C26.1 ; v2(25.225,26.517) 25.225,26.863 ; C14.1 25.225,26.863 ; C10.1 25.225,26.863
  other v1: 28.601,0.6 28.601,1.358 30.338,1.835 36.338,1.835 38.338,1.835 40.338,1.835 42.338,1.835 44.338,1.835 46.338,1.835 48.338,1.835 28.601,2.115 32.594,2.328 33.46,2.328 34.327,2.328 35.193,2.328 30.996,2.822 28.601,2.873 29.399,2.873 30.198,2.873 31.795,2.873 35.498,3.086 37.338,3.835 39.338,3.835 41.338,3.835 35.498,3.844 28.6,4.427 29.399,4.427 30.198,4.427 31.795,4.427 35.193,4.601 28.6,5.226 30.198,5.226 30.996,5.226 31.795,5.226 35.498,5.626 36.338,5.835 38.338,5.835 40.338,5.835 42.338,5.835 28.6,6.024 35.498,6.424 28.6,6.823 29.399,7.223 30.198,7.223 30.996,7.223 32.695,7.223 33.469,7.223 34.242,7.223 35.015,7.223 35.788,7.223 28.6,7.622 37.338,7.835 39.338,7.835 29.399,8.022 30.198,8.022 30.996,8.022 32.695,8.022 33.469,8.022 34.242,8.022 35.015,8.022 35.788,8.022 28.6,8.42 28.6,9.219 30.338,9.835 36.338,9.835 38.338,9.835 40.338,9.835 28.6,10.017 28.6,10.816 28.6,11.615 29.338,11.835 35.338,11.835 37.338,11.835 39.338,11.835 28.6,12.413 28.6,13.212 30.338,13.835 36.338,13.835 38.338,13.835 40.338,13.835 28.6,14.011 28.6,14.809 28.6,15.608 29.338,15.835 35.338,15.835 37.338,15.835 39.338,15.835 43.338,15.835 28.6,16.407 28.6,17.205 48.85,17.29 30.338,17.835 44.338,17.835 28.6,18.004 47.44,18.7 28.6,18.803 44.842,19.4 28.6,19.601 29.338,19.835 41.338,19.835 43.338,19.835 0.601,20.4 1.401,20.4 2.201,20.4 3.001,20.4 3.801,20.4 4.601,20.4 5.401,20.4 6.201,20.4 7.001,20.4 7.801,20.4 8.601,20.4 9.401,20.4 10.201,20.4 11.001,20.4 11.801,20.4 12.601,20.4 13.401,20.4 14.201,20.4 15.001,20.4 15.801,20.4 16.601,20.4 17.401,20.4 18.201,20.4 19.001,20.4 19.801,20.4 20.601,20.4 21.401,20.4 22.201,20.4 23.001,20.4 23.801,20.4 24.601,20.4 25.401,20.4 26.201,20.4 27.001,20.4 27.801,20.4 28.601,20.4 47.44,21.35 34.338,21.835 47.44,23.65 3.338,23.835 15.338,23.835 17.338,23.835 29.338,23.835 44.842,25.6 4.338,25.835 6.338,25.835 10.338,25.835 47.44,26.3 26.95,26.863 3.338,27.835 7.338,27.835 19.338,27.835 49.338,27.835 2.338,29.835 4.338,29.835 14.338,29.835 18.338,29.835 20.338,29.835 48.338,29.835 3.338,31.835 15.338,31.835 19.338,31.835 29.338,31.835 31.338,31.835 45.338,31.835 49.338,31.835 2.338,33.835 14.338,33.835 16.338,33.835 18.338,33.835 34.535,35.738 3.338,35.835 49.338,35.835 2.338,37.835 38.18,38.977 3.338,39.835 5.338,39.835 7.338,39.835 9.338,39.835 11.338,39.835 33.338,39.835 39.338,39.835 49.338,39.835 2.338,41.835 8.338,41.835 12.338,41.835 14.338,41.835 30.338,41.835 36.338,41.835 26.856,42.459 3.338,43.835 19.338,43.835 49.338,43.835 8.338,45.835 14.338,45.835 18.338,45.835 7.338,47.835 13.338,47.835 19.338,47.835 29.338,47.835 35.338,47.835 37.338,47.835 41.338,47.835
  other v2: 39.138,31.333 39.9,31.333 40.662,31.333 39.138,32.095 39.9,32.095 40.662,32.095 39.138,32.857 39.9,32.857 40.662,32.857 11.215,33.121
I\R\Q\: U2.53 U4.2 | length 35.3
  Bottom Layer w0.254: U2.53 20.4,25.438 ccw(c23.008,25.438) 23.008,22.83 29.662,22.83 cw(c29.662,18.35) 34.143,18.35 ccw(c35.322,18.35) 35.322,17.17 42.283,17.17 cw(c42.283,15.062) 43.774,16.553 46.059,14.267 ccw(c47.55,15.758) 47.55,13.65 U4.2
LED0: D1.1 U2.23 | length 20.3
  Top Layer w0.35: D1.1 v2(5.881,47.825)
  Bottom Layer w0.18: v2(5.881,47.825) 5.881,47.726 ccw(c7.303,47.726) 6.298,46.721 7.483,45.535 ccw(c9.663,47.715) 9.663,44.632 15.077,44.632 cw(c15.077,41.809) 17.9,41.809 U2.23
LED1: D2.1 U2.24 | length 15.2
  Top Layer w0.35: D2.1@10.714,47.8 v2(11.595,47.8)
  Bottom Layer w0.18: v2(11.595,47.8) 11.595,47.7 ccw(c13.018,47.7) 12.012,46.694 13.342,45.364 ccw(c14.213,46.236) 14.213,45.003 15.117,45.003 cw(c15.117,41.72) 18.4,41.72 U2.24
LED2: D3.1 U2.25 | length 11.6
  Top Layer w0.35: D3.1 v2(17.31,47.825)
  Bottom Layer w0.18: v2(17.31,47.825) 17.31,45.134 ccw(c18.231,45.134) 17.58,44.482 cw(c14.392,41.294) 18.9,41.294 U2.25
LED3: D4.1 U2.26 | length 12.4
  Top Layer w0.35: D4.1@22.143,47.8 v2(23.024,47.8)
  Bottom Layer w0.18: U2.26 19.4,40.801 cw(c22.515,40.801) 20.312,43.004 22.678,45.369 ccw(c21.842,46.205) 23.024,46.205 v2(23.024,47.8)
LED4: D5.1 U2.27 | length 14.8
  Top Layer w0.35: v2(26.976,47.825) D5.1
  Bottom Layer w0.18: U2.27 19.9,41.032 cw(c22.44,41.032) 20.644,42.828 24.922,47.106 cw(c26.718,45.31) 26.718,47.85 v2@27.119,47.85
LED5: D6.1 U2.28 | length 19.7
  Top Layer w0.35: v2(32.691,47.8) D6.1@33.572,47.8
  Bottom Layer w0.18: U2.28 20.4,41.041 cw(c22.94,41.041) 21.144,42.837 23.025,44.718 cw(c24.474,43.269) 24.474,45.318 28.098,45.318 ccw(c28.098,46.419) 28.876,45.64 ; 28.877,45.641 30.619,47.383 cw(c31.625,46.378) 31.377,47.778 cw(c31.625,46.378) 31.625,47.8 v2(32.691,47.8)
LED6: D7.1 U2.29 | length 25
  Top Layer w0.35: v2(38.405,47.775) D7.1@39.286,47.775
  Bottom Layer w0.18: U2.29 20.9,40.992 cw(c23.44,40.992) 21.644,42.788 23.35,44.495 cw(c24.378,43.467) 24.378,44.92 34.961,44.92 ccw(c34.961,46.343) 35.967,45.337 v2(38.405,47.775)
LED7: D8.1 U2.30 | length 30.1
  Top Layer w0.35: v2(44.119,47.825) D8.1
  Bottom Layer w0.18: U2.30 21.4,40.874 cw(c24.284,40.874) 22.245,42.914 23.491,44.16 cw(c24.47,43.182) 24.47,44.566 38.899,44.566 ccw(c38.899,47.331) 40.854,45.376 42.727,47.248 cw(c44.119,45.857) v2(44.119,47.825)
MISO: U2.56 U4.1 | length 36.1
  Top Layer w0.254: v2(32.254,18.014) v2(37.44,18.014)
  Bottom Layer w0.254: U2.56 18.9,25.392 ccw(c22.756,25.392) 22.756,21.536 29.387,21.536 cw(c29.387,18.669) 32.254,18.669 v2(32.254,18.014) ; v2(37.44,18.014) ccw(c38.459,19.033) 38.459,17.591 42.455,17.591 cw(c42.455,15.483) 43.946,16.974 44.652,16.267 ccw(c46.143,17.758) 46.143,15.65 U4.1
MOSI: U2.57 U4.12 | length 26.9
  Bottom Layer w0.254: U2.57 18.4,25.39 ccw(c22.708,25.39) 22.708,21.082 29.276,21.082 cw(c29.276,18.818) 31.54,18.818 31.54,12.362 ccw(c32.251,12.362) 32.251,11.65 U4.12
NetA1_1: A1.1 C23.1 | length 2.5
  Bottom Layer w0.254: C23.1@29.13,3.65 C23.1
  Bottom Layer w0.5: A1.1 C23.1@29.13,3.65
NetC7_2: C7.2 U2.5 X1.1 | length 13
  Bottom Layer w0.2: X1.1 6.9,34.019 C7.2 5.217,34.019 ccw(c5.217,33.735) 4.933,33.735 4.933,31.995 ccw(c5.375,31.995) 5.375,31.553 9.235,31.553 cw(c9.235,29.445) 10.725,30.936 11.144,30.517 ccw(c11.789,31.162) 11.789,30.25 U2.5
NetC8_2: C8.2 U2.6 X1.3 | length 5.9
  Bottom Layer w0.2: X1.3 9.1,33.019 10.5,33.019 10.5,32.328 ccw(c11.922,32.328) 10.916,31.322 11.332,30.907 ccw(c11.71,31.285) 11.71,30.75 U2.6
NetC9_2: C9.2 U2.7 | length 1.6
  Bottom Layer w0.2: C9.2 ccw(c12.463,32.478) 12.463,31.25 U2.7
NetC10_2: C10.2 U2.47 | length 2
  Bottom Layer w0.18: U2.47 25.86,28.75 C10.2
NetC11_2: C11.2 U2.31 | length 2
  Bottom Layer w0.18: U2.31 21.9,39.21 C11.2
NetC23_2: C23.2 L1.1 U4.8 | length 2.5
  Bottom Layer w0.5: C23.2@30.205,3.65 U4.8@32.659,3.65
NetD1_2: D1.2 R1.2 | length 1.3
  Top Layer w0.35: v2(4.365,46.2) D1.2@5,46.2
  Bottom Layer w0.4: v2@4.392,46.2 R1.2@5.027,46.2
NetD2_2: D2.2 R2.2 | length 1.3
  Top Layer w0.35: v2(10.079,46.175) D2.2
  Bottom Layer w0.4: v2(10.079,46.175) R2.2
NetD3_2: D3.2 R3.2 | length 1.3
  Top Layer w0.35: v2(15.794,46.175) D3.2
  Bottom Layer w0.4: v2(15.794,46.175) R3.2
NetD4_2: D4.2 R4.2 | length 1.3
  Top Layer w0.35: v2(21.508,46.175) D4.2
  Bottom Layer w0.4: v2(21.508,46.175) R4.2
NetD5_2: D5.2 R5.2 | length 1.3
  Top Layer w0.35: v2(27.222,46.175) D5.2
  Bottom Layer w0.4: v2(27.222,46.175) R5.2
NetD6_2: D6.2 R6.2 | length 1.2
  Top Layer w0.35: v2(32.937,46.175) D6.2
  Bottom Layer w0.4: v2(32.937,46.175) R6.2@33.543,46.175
NetD7_2: D7.2 R7.2 | length 1.3
  Top Layer w0.35: v2(38.651,46.175) D7.2
  Bottom Layer w0.4: v2(38.651,46.175) R7.2
NetD8_2: D8.2 R8.2 | length 1.3
  Top Layer w0.35: v2(44.365,46.2) D8.2@45,46.2
  Bottom Layer w0.4: v2(44.365,46.2) R8.2@45,46.2
NetD9_2: D9.2 R9.2 | length 20.1
  Top Layer w0.3: v2(37.537,19.678) 42.433,14.783 cw(c40.444,12.794) 43.256,12.794 43.256,4.508 ccw(c44.679,4.508) 43.673,3.502 D9.2
  Bottom Layer w0.4: R9.2@37.537,18.863 R9.2 v2(37.537,19.678)
NetD10_2: D10.2 R10.2 | length 16.4
  Top Layer w0.3: v2(38.879,19.678) 38.879,19.622 ccw(c40.301,19.622) 39.295,18.617 42.779,15.133 cw(c39.408,11.763) 44.175,11.763 D10.2
  Bottom Layer w0.4: R10.2@38.879,18.863 R10.2 v2(38.879,19.678)
NetD11_1: D11.1 Q1.1 R30.1 R31.2 | length 30.2
  Top Layer w0.25: v2(12.932,24.075) 13.683,24.826 ccw(c12.678,25.832) 14.1,25.832 v2(14.1,27.384)
  Bottom Layer w0.2: v2(14.1,27.384) 14.1,27.632 cw(c15.522,27.632) 14.517,28.638 21.771,35.892 cw(c22.493,35.17) 22.493,36.191 28.639,36.191 ccw(c28.639,38.015) 29.929,36.725 R30.1
  Bottom Layer w0.25: D11.1 v2(12.932,24.075)
  Bottom Layer w0.4: R30.1 ccw(c31.156,37.803) 31.156,37.653 Q1.1 32.666,37.653 cw(c32.666,36.96) 33.359,36.96 R31.2
NetJ2_1: J2.1 R15.1 | length 2.9
  Bottom Layer w0.35: R15.1 43.531,24.544 ccw(c45.327,26.34) 45.327,23.8 J2.1
NetJ2_2: J2.2 R16.1 | length 2.7
  Bottom Layer w0.4: R16.1 cw(c43.555,23.072) 43.555,23.15 J2.2
NetJ2_3: J2.3 R17.1 | length 2.8
  Bottom Layer w0.4: R17.1 43.685,21.856 ccw(c43.685,23.29) 44.7,22.276 cw(c45.241,21.735) 45.241,22.5 J2.3
NetQ2_1: Q2.1 R32.2 | length 1.5
  Bottom Layer w0.4: R32.2 ccw(c34.143,29.525) 34.293,29.525 Q2.1
NetQ2_3: Q2.3 R31.1 | length 1.4
  Bottom Layer w0.4: Q2.3 33.359,32.763 R31.1
NetR12_2: R12.2 R13.2 U1.2 | length 3.5
  Bottom Layer w0.4: U1.2 R13.2 R12.2
PWR_ON: R32.1 U2.41 | length 9.2
  Bottom Layer w0.2: U2.41 25.911,31.75 cw(c25.911,30.328) 26.917,31.333 28.458,29.792 ccw(c29.464,30.797) 29.464,29.375 R32.1
RSSI: U2.8 U4.15 | length 29.1
  Top Layer w0.2: v2(14.015,31.75) 18.283,27.482 ccw(c19.288,28.488) 19.288,27.065 25.325,27.065 cw(c25.325,26.443) 25.948,26.443 v2(25.948,25.821)
  Bottom Layer w0.25: v2(25.948,25.821) 28.672,25.821 cw(c28.672,24.398) 29.678,25.404 35.384,19.698 cw(c34.378,18.692) 35.801,18.692 U4.15
  Bottom Layer w0.254: U2.8 v2(14.015,31.75)
SCK: U2.55 U4.13 | length 25.2
  Bottom Layer w0.254: U2.55 19.4,25.306 ccw(c22.75,25.306) 22.75,21.956 29.515,21.956 cw(c29.515,18.549) 32.922,18.549 32.922,17.721 cw(c32.122,17.721) 32.594,17.075 ccw(c34.02,15.65) 32.004,15.65 32.004,14.011 ccw(c32.365,14.011) 32.365,13.65 U4.13
STBY: R9.1 U1.6 U2.43 | length 28
  Top Layer w0.2: v2(37.025,31.46) 37.277,31.208 cw(c36.271,30.202) 37.694,30.202 37.694,21.808 cw(c37.16,21.808) v2(37.537,21.431)
  Bottom Layer w0.2: U2.43 25.42,30.75 cw(c25.42,28.642) 26.909,30.134 ; 26.91,30.133 ccw(c25.42,28.642) 26.909,30.134 ; v2(37.025,31.46) 35.91,31.46 ccw(c35.91,31.146) 35.596,31.146 35.596,28.586 cw(c34.925,28.586) 34.925,27.915 30.002,27.915 cw(c30.002,30.023) 28.512,28.531 cw(c30.002,30.023) 28.511,28.532 26.909,30.134
  Bottom Layer w0.4: R9.1 v2(37.537,21.431)
SWCLK: J3.1 U2.49 | length 23.7
  Top Layer w0.2: v2(17.652,21.684) ccw(c17.652,22.944) 18.543,22.053 21.27,24.78 cw(c22.276,23.774) 22.276,25.197 v2(22.324,25.197)
  Bottom Layer w0.254: J3.1 2.058,21.902 ccw(c2.769,22.612) 2.769,21.608 v2@17.652,21.608 ; v2@22.4,25.197 U2.49
SWDIO: J3.2 U2.46 | length 33.2
  Top Layer w0.2: v2(18.201,21.158) 21.401,24.358 cw(c22.26,23.499) 22.26,24.714 22.475,24.714 ccw(c22.475,25.197) v2(22.957,25.197)
  Bottom Layer w0.254: J3.2 1.125,24.624 ccw(c2.921,22.828) 0.381,22.828 0.381,22.301 ccw(c1.524,22.301) 1.524,21.158 v2(18.201,21.158) ; v2@22.881,25.197 22.881,28.75 cw(c23.381,28.75) 23.381,29.25 U2.46
VB: J1.1 J4.1 | length 11.8
  Bottom Layer w0.254: J1.1 47.066,43.25 cw(c47.066,41.828) 48.489,41.828 48.489,35.759 cw(c48,35.759) J4.1
VBAT: C1.2 J1.2 Q1.2 R30.2 U1.5 | length 43.7
  Top Layer w0.508: v2(30.021,39.403) 30.021,33.097 ccw(c34.163,33.097) 34.163,28.956 v2(37.025,28.956) v2(37.025,28.299) v2(37.025,27.642)
  Bottom Layer w0.508: Q1.2 31.369,39.553 ccw(c31.369,39.041) R30.2 v2(30.021,39.403) 29.629,39.403 cw(c29.629,40.433) 28.599,40.433 28.599,42.909 cw(c29.264,42.909) 29.264,43.575 36.517,43.575 cw(c36.517,42.153) 37.522,43.158 37.699,42.982 ccw(c38.705,43.987) 38.705,42.565 42.56,42.565 cw(c42.56,41.261) 43.864,41.261 43.864,40.752 J1.2 ; C1.2 v2(37.025,28.299) v2(37.025,28.956) U1.5
VSYS: C5.2 Q1.3 R11.2 U3.3 | length 8.9
  Bottom Layer w0.6: R11.2 34.248,40.91 34.248,38.714 Q1.3 ccw(c36.347,38.603) 34.941,37.198 C5.2 cw(c36.993,35.146) 36.993,36.075 U3.3
pads on no net: A1.2 J1. J1.3 J2.4 LOGO1. U2.2 U2.9 U2.10 U2.11 U2.14 U2.16 U2.34 U2.35 U2.37 U2.40 U2.58 U2.59 U2.61 U2.62 U4.3 U4.4 U4.5 U4.6 U4.11

## Polygon pours and split planes (outlines as drawn)
GND on Bottom Layer "NONET_L02_P-001" (solid, remove dead copper, pour order 1): -0.001,0 50.5,0 50.5,50 -0.001,50
GND on Top Layer "NONET_L02_P-001" (solid, remove dead copper, pour order 0): 0,0 50.5,0 50.5,50 0,50

## Keep-outs
Keep-Out Layer:
  the board outline again, w0.001

## Other copper
Bottom Layer:
  pour cut-out: 33.651,4.112 27.701,4.112 27.701,3.188 33.651,3.188
Multi-Layer:
  pour cut-out: 28.2,0 28.2,20 0,20 0,0

## Silkscreen, mask and mechanical layers (free items; w line width, h text height)
Top Overlay:
  text "G" at 2.897,27.807 h0.8 r270
  text "D" at 2.897,25.267 h0.8 r270
  text "C" at 2.897,22.727 h0.8 r270
  text "FS Ctrl 2k23 v1.1.0" at 49.962,8.481 h0.8 r90
  text "CHRG" at 40.015,5.414 h0.8
  text "STBY" at 40.015,2.464 h0.8
Bottom Overlay:
  text "1" at 48.926,43.117 h0.8 r270
  text "0" at 48.926,38.484 h0.8 r270
  text "+" at 49.193,35.003 h0.8 r270
  text "-" at 49.193,32.463 h0.8 r270
  text "G" at 2.905,27.268 h0.8 r270
  text "D" at 2.905,24.728 h0.8 r270
  text "C" at 2.905,22.188 h0.8 r270
Mechanical 3:
  lines w0.001: 0.001,0 0.001,20 28.201,20 28.201,0 ; 27.701,0 27.701,6.4

## Text inside footprints (layer, text, board x,y; h text height)
J2: Mechanical 1 "PCB Edge" at 50.725,26.2 h0.25 r90